# Altium PCB PL2303HXD.PcbDoc
Units mm, origin at the board's own origin, x right, y up, seen from the top; angles counter-clockwise.
Board outline 152.4 x 101.6 mm, 2 copper layers (Top Layer, Bottom Layer); 16 components, 36 nets, 107 pads, 18 vias.
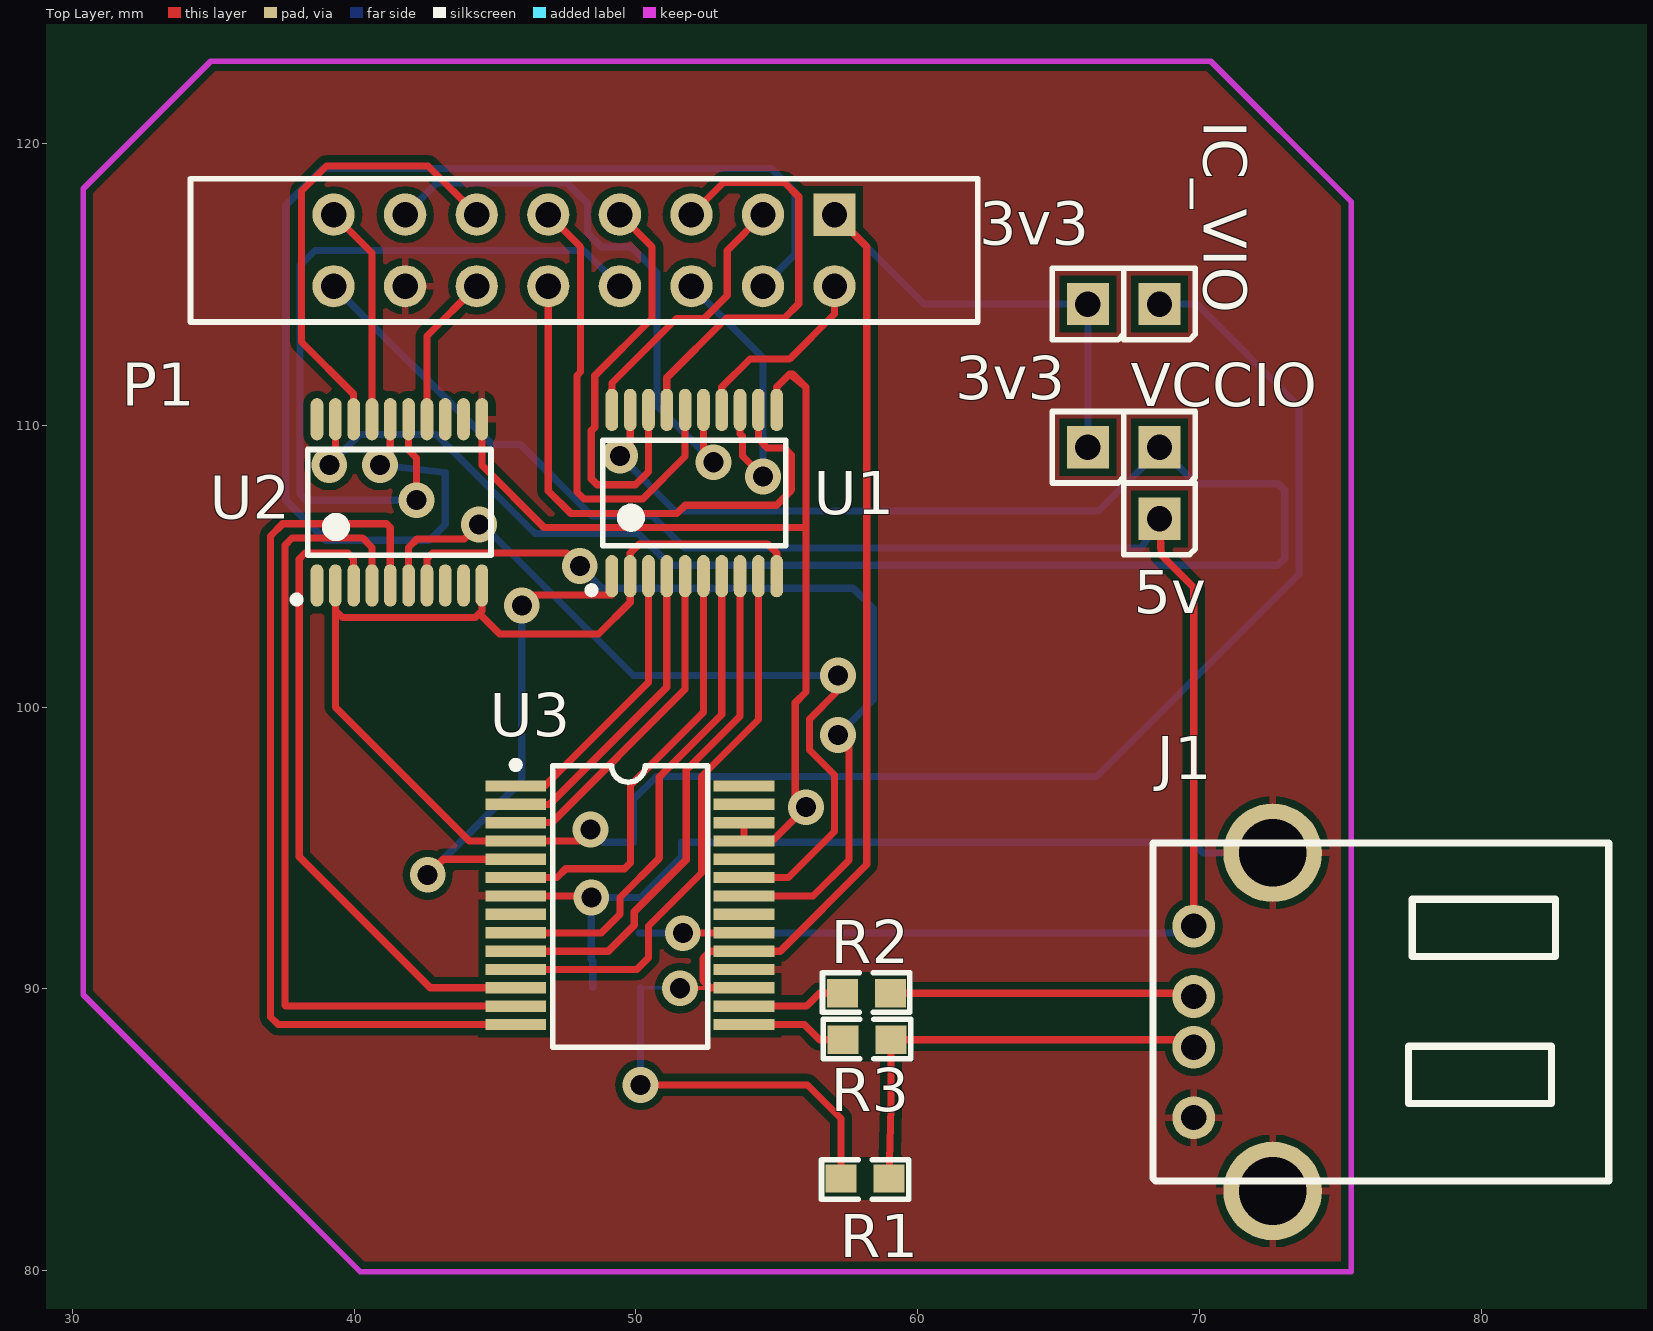
[diagram p0: Top Layer view]
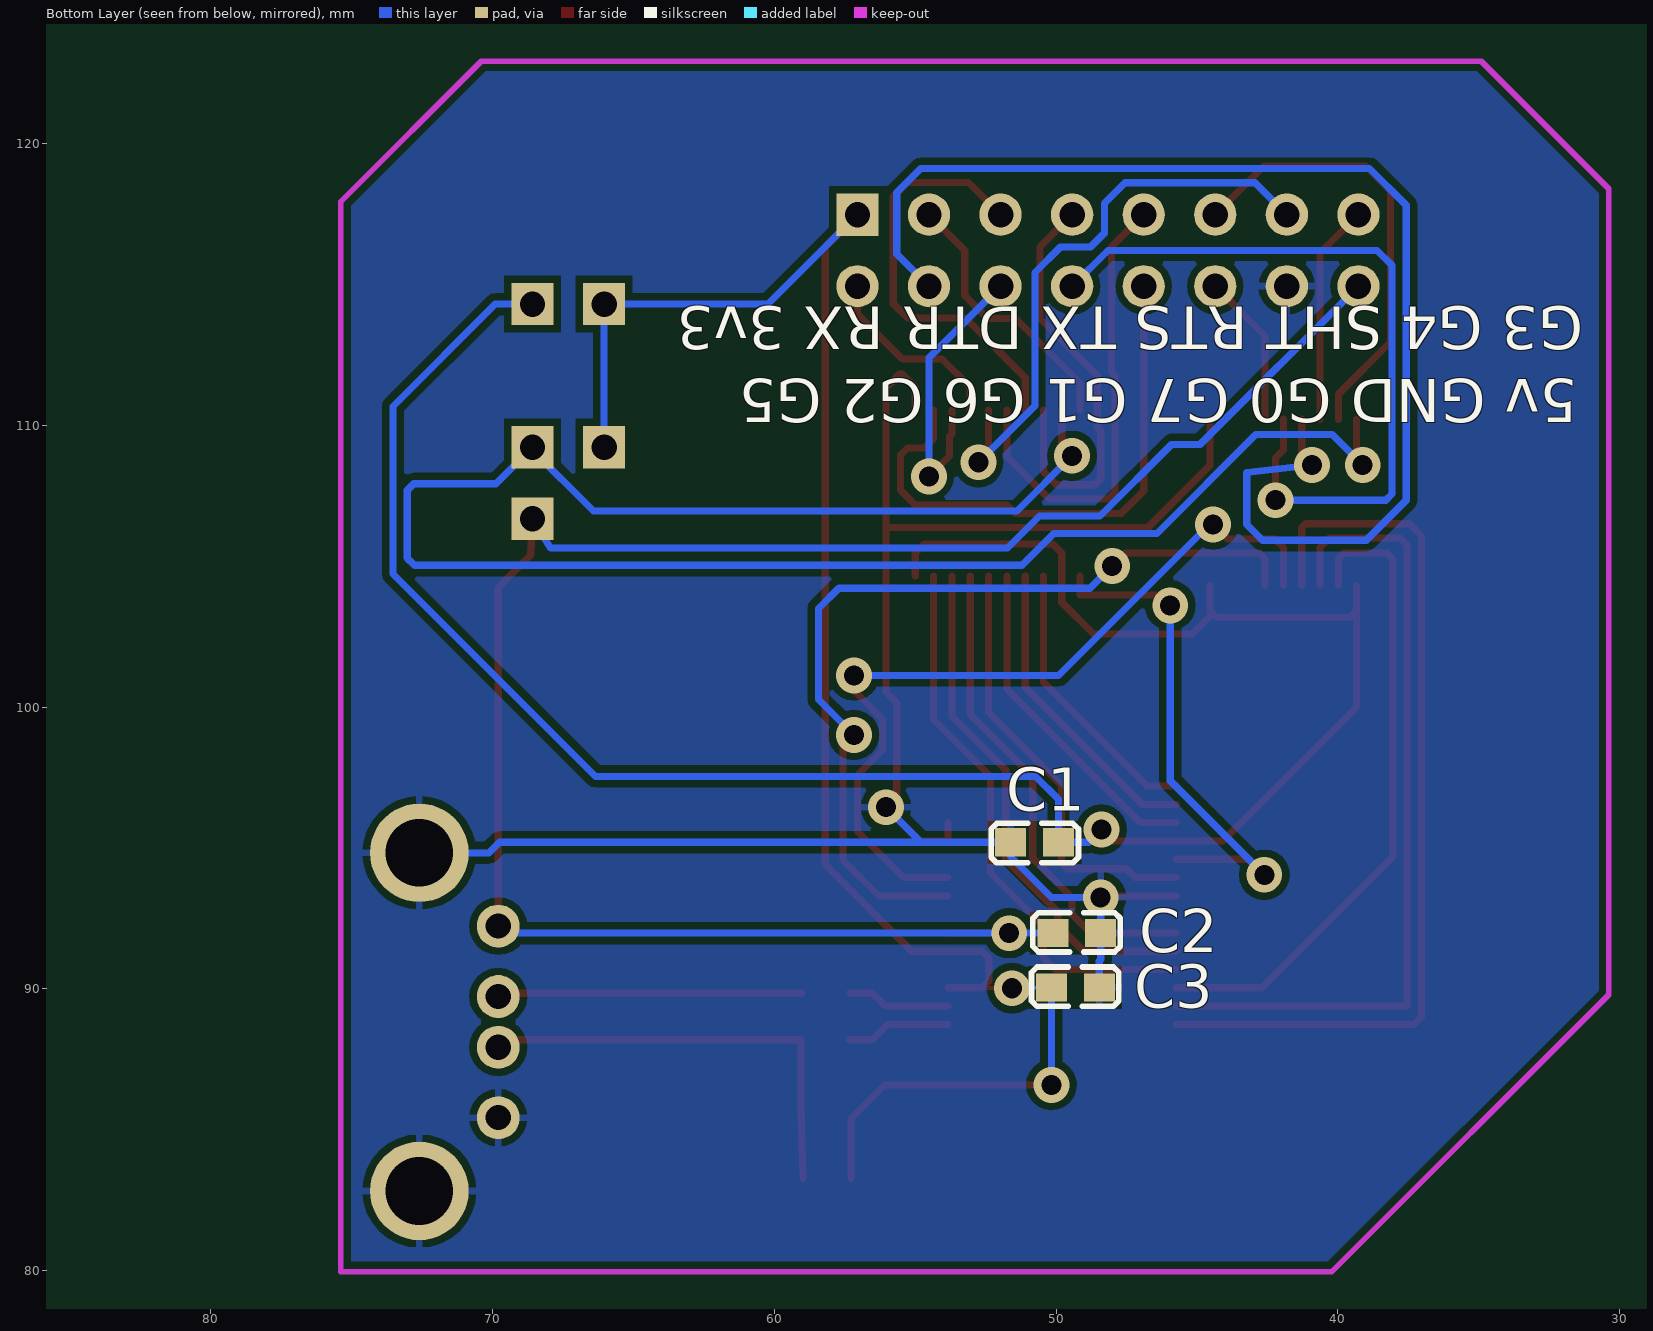
[diagram p1: Bottom Layer view, seen from below]

## Layer stack, top to bottom
Top Solder: solder mask 0.0102, Solder Resist, Dk 3.5
Top Layer: signal copper 0.0356
Dielectric 1: dielectric 0.32, FR-4, Dk 4.8
Bottom Layer: signal copper 0.0356
Bottom Solder: solder mask 0.0102, Solder Resist, Dk 3.5

## Board outline
25.4,25.4 177.8,25.4 177.8,127 25.4,127

## Design rules (kind name [scope] priority, off if disabled: settings)
Clearance [All] p1: gap=0.254
ComponentClearance [All] p1 off: gap=0.254 collisioncheckmode=3 verticalgap=0.254 showdistances=FALSE
HoleSize [All] p1 off: absolutevalues=TRUE maxlimit=2.54 minlimit=0.025 maxpercent=80.000 minpercent=20.000
HoleToHoleClearance [All] p1 off: gap=0.254 allowstackedmicrovias=TRUE
LayerPairs [All] p1 off: enforce=TRUE
MinimumSolderMaskSliver [All] p1 off: minsoldermaskwidth=0.254
NetAntennae [All] p1 off: netantennaetolerance=0
PasteMaskExpansion [All] p1 off: expansion=0
PolygonConnect [All] p1: connectstyle=Relief reliefconductorwidth=0.254 reliefentries=4 polygonreliefangle="90 Angle" airgapwidth=0.254
RoutingVias [All] p1: holewidth=0.711 width=1.27 viastyle="Through Hole" minholewidth=0.711 minwidth=1.27 maxholewidth=0.711 maxwidth=1.27
SilkToBoardRegionClearance [All] p1 off:
SilkToSilkClearance [All] p1 off: silktosilkclearance=0.254
SilkToSolderMaskClearance [IsPad] p1 off: minsilkscreentomaskgap=0.254 clearancetoexposedcopper=TRUE
SolderMaskExpansion [All] p1 off: expansion=0.102
Width [All] p1: maxlimit=2.54 minlimit=0.152 preferedwidth=0.254
20 further rules are at their usual default settings.

## Classes and differential pairs
component class pl2303HXD: 3v3 5v C1 C2 C3 IC_VIO J1 P1 R1 R2 R3 U1 U2 U3 VCCIO

## Components (designator, comment, footprint, x,y, rotation, side; value= is the part's Value field where it differs from the comment)
3v3 "Header 1" HDR1*1 66.04,109.22 r0 top (schematic designator H3)
3v3 "Header 1" HDR1*1 66.04,114.3 r0 top (schematic designator H4)
5v "Header 1" HDR1*1 68.58,106.68 r0 top (schematic designator H2)
C1 "Cap" CAP-0603 49.911,95.199 r0 bottom
C2 "Cap" CAP-0603 50.114,91.973 r180 bottom
C3 "Cap" CAP-0603 50.165,90.043 r180 bottom
IC_VIO "Header 1" HDR1*1 68.58,114.3 r0 top (schematic designator H5)
J1 "USB_CON" USB-A 71.196,88.824 r0 top
P1 "Header 8X2" HDR2*8 57.048,117.475 r180 top
R1 "Res2" RES-0603 58.979,83.261 r180 top
R2 "Res2" RES-0603 57.328,89.84 r0 top
R3 "Res2" RES-0603 57.353,88.189 r0 top
U1 "TXS0108" TSSOP20_44MM_065P 52.07,107.594 r90 top
U2 "TXS0108" TSSOP20_44MM_065P 41.605,107.264 r90 top
U3 "PL2303HXD" SSOP28 49.784,92.964 r270 top
VCCIO "Header 1" HDR1*1 68.58,109.22 r0 top (schematic designator H1)

## Footprints (in the part's own frame and the unit in brackets; to place one, negate y for a bottom-side part, rotate by r counter-clockwise, add the part's x,y. Pads: shape width x height; smd on the part's side, far side on the other; paste and mask are expansions set on the pad)
CAP-0603 [mm]
  rect 1.1x1 smd: 1(0,0) 2(1.7,0)
  silkscreen extent -0.71,-0.67 2.39,0.73
HDR1*1 [mm]
  rect 1.5x1.5 hole 0.9: 1(0,0)
  silkscreen extent -1.27,-1.27 1.27,1.27
HDR2*8 [mm]
  rect 1.5x1.5 hole 0.9: 1(0,0)
  round 1.5 hole 0.9: 2(2.54,0) 3(5.08,0) 4(7.62,0) 5(10.16,0) 6(12.7,0) 7(15.24,0) 8(17.78,0) 9(0,2.54) 10(2.54,2.54) 11(5.08,2.54) 12(7.62,2.54) 13(10.16,2.54) 14(12.7,2.54) 15(15.24,2.54) 16(17.78,2.54)
  silkscreen extent -5.08,-1.27 22.86,3.81
RES-0603 [mm] "1/10W"
  rect 1.1x1 smd: 1(0,0) 2(1.7,0)
  silkscreen extent -0.71,-0.67 2.39,0.73
SSOP28 [mm]
  rect 0.4x2.15 smd: 1(-4.231,-4.051) 2(-3.581,-4.051) 3(-2.931,-4.051) 4(-2.281,-4.051) 5(-1.631,-4.051) 6(-0.981,-4.051) 7(-0.331,-4.051) 8(0.319,-4.051) 9(0.981,-4.051) 10(1.631,-4.051) 11(2.281,-4.051) 12(2.931,-4.051) 13(3.581,-4.051) 14(4.231,-4.051) 15(4.231,4.051) 16(3.581,4.051) 17(2.931,4.051) 18(2.281,4.051) 19(1.631,4.051) 20(0.981,4.051) 21(0.319,4.051) 22(-0.331,4.051) 23(-0.981,4.051) 24(-1.631,4.051) 25(-2.281,4.051) 26(-2.931,4.051) 27(-3.581,4.051) 28(-4.231,4.051)
  silkscreen extent -5.11,-4.18 5.05,2.77
TSSOP20_44MM_065P [mm]
  oval 1.5x0.45 smd: 1(-2.95,2.925) 2(-2.95,2.275) 3(-2.95,1.625) 4(-2.95,0.975) 5(-2.95,0.325) 6(-2.95,-0.325) 7(-2.95,-0.975) 8(-2.95,-1.625) 9(-2.95,-2.275) 10(-2.95,-2.925) 11(2.95,-2.925) 12(2.95,-2.275) 13(2.95,-1.625) 14(2.95,-0.975) 15(2.95,-0.325) 16(2.95,0.325) 17(2.95,0.975) 18(2.95,1.625) 19(2.95,2.275) 20(2.95,2.925)
  silkscreen extent -3.57,-3.25 1.87,3.77
USB-A [mm]
  round 1.524 hole 0.889: 1(-1.4,3.4) 2(-1.4,0.9) 3(-1.4,-0.9) 4(-1.4,-3.4)
  round 3.5 hole 2.4: 4(1.4,-6) 4(1.4,6)
  silkscreen extent -2.85,-5.65 13.33,6.35

## Part data
C1 C2 C3: "Capacitor"
J1: library part USBx4, "USB 1.1, Right Angle, Thru-Hole, A Type, Receptacle, 4x4x4x4 Position, Fourfold Stacked, Black"
P1: "Header, 8-Pin, Dual row"
R1 R2 R3: "Resistor"

## Via types
v1: diameter 1.27, hole 0.711, Top Layer to Bottom Layer, 18 vias

## Nets (pads, with @x,y where several pads share a name; then routed paths per layer and width w, separated by ;. In a path a pad name is that pad's centre, name@x,y a point inside that pad or via, vN(x,y) a via of type N, cw(c..) or ccw(c..) an arc to the next point about the centre after c; other vN are vias at no path point)
CTS_N(G7): U1.9 U3.11 | length 20
  Top Layer w0.254: U3.11 50.026,90.683 50.446,91.103 50.446,92.229 52.324,94.107 52.324,97.536 54.345,99.557 U1.9
DCD_N(G6): U1.8 U3.10 | length 18.5
  Top Layer w0.254: U3.10 49.019,91.333 49.938,92.253 49.938,92.732 51.786,94.58 51.786,97.76 53.695,99.67 U1.8
DGND: C1.2 C2.2 C3.2 J1.4 P1.15 U1.11 U2.11 U3.7 U3.18 U3.25 U3.26 | length 68.9
  Top Layer w0.254: U2.11 44.53,108.581 46.746,106.365 56.032,106.365 ; U3.7 48.363,93.295 v1(48.414,93.243) ; U3.26 U3.25 54.833,95.245 v1@55.651,96.063 ; U1.11 54.995,111.354 55.452,111.811 ; v1(56.032,96.444) v1@55.651,96.063 ; 55.452,111.811 55.575,111.811 56.032,111.354 ; 55.452,111.811 56.032,111.354 ; v1@55.651,96.063 55.651,100.152 56.032,100.533 56.032,106.365 ; 56.032,106.365 56.032,111.354
  Bottom Layer w0.254: C3.2 48.465,90.983 48.414,91.034 C2.2 v1(48.414,93.243) 50.163,93.243 51.611,94.691 C1.2 54.788,95.199 ; v1(56.032,96.444) 54.788,95.199 ; J1.4@72.596,94.824 70.129,94.824 69.754,95.199 54.788,95.199
DM: J1.2 R2.2 | length 10.7
  Top Layer w0.254: R2.2 J1.2@69.68,89.84
DP: J1.3 R1.1 R3.2 | length 15.4
  Top Layer w0.254: R1.1 59.053,85.799 R3.2 J1.3@69.531,88.189
DSR_N(G5): U1.7 U3.9 | length 17.5
  Top Layer w0.254: U3.9 48.768,91.983 49.43,92.645 49.43,93.24 50.825,94.635 50.825,97.518 53.045,99.738 U1.7
DTR_N: U1.4 U3.2 | length 11
  Top Layer w0.254: U3.2 46.939,96.545 51.095,100.701 U1.4
DTR_NO: P1.3 U1.17 | length 15.2
  Top Layer w0.254: U1.17 51.095,111.684 53.215,113.804 55.27,113.804 55.778,114.312 55.778,118.11 55.27,118.618 53.111,118.618 P1.3
G0: P1.14 U2.14 | length 5.5
  Top Layer w0.254: U2.14 42.58,113.167 P1.14
G1: P1.12 U2.15 | length 27.4
  Top Layer w0.254: U2.15 41.93,109.118 42.215,108.834 v1(42.215,107.34)
  Bottom Layer w0.254: v1(42.215,107.34) 38.299,107.34 38.08,107.559 38.08,115.677 38.608,116.205 48.158,116.205 P1.12
G2: P1.10 U2.16 | length 45.7
  Top Layer w0.254: v1(40.919,108.585) 41.28,108.946 U2.16
  Bottom Layer w0.254: v1(40.919,108.585) 43.231,108.329 43.231,106.477 42.672,105.918 38.989,105.918 37.572,107.335 37.572,117.811 38.875,119.114 54.8,119.114 55.651,118.262 55.651,116.078 P1.10
G3: P1.8 U2.17 | length 7.8
  Top Layer w0.254: P1.8 40.63,116.113 U2.17
G4: P1.7 U1.15 | length 20.9
  Top Layer w0.254: U1.15 52.395,109.047 v1(52.756,108.687)
  Bottom Layer w0.254: P1.7 42.939,118.606 47.549,118.606 48.285,117.869 48.285,116.815 48.768,116.332 49.835,116.332 50.749,115.418 50.749,110.693 v1(52.756,108.687)
G5: P1.9 U1.14 | length 6.9
  Top Layer w0.254: U1.14 53.045,111.354 54.048,112.356 55.455,112.356 57.048,113.95 P1.9
G6: P1.11 U1.13 | length 10.5
  Top Layer w0.254: U1.13 53.695,109.694 53.777,109.612 53.777,108.909 v1(54.508,108.179)
  Bottom Layer w0.254: P1.11 54.508,112.396 v1(54.508,108.179)
G7: P1.13 U1.12 | length 20.3
  Top Layer w0.254: P1.13 46.888,107.671 47.686,106.873 51.461,106.873 51.75,107.163 54.99,107.163 55.524,107.696 55.524,108.941 55.27,109.195 54.661,109.195 54.345,109.51 U1.12
GND: 
GP0: U2.7 U3.22 | length 31.5
  Top Layer w0.254: U2.7 42.58,105.258 42.783,105.461 47.549,105.461 v1(48.006,105.004) ; U3.22 56.287,93.295 57.556,94.564 57.556,98.628 v1(57.175,99.009)
  Bottom Layer w0.254: v1(48.006,105.004) 48.793,104.216 57.709,104.216 58.43,103.495 58.43,100.264 v1(57.175,99.009)
GP1: U2.6 U3.23 | length 29.4
  Top Layer w0.254: U2.6 41.93,105.664 42.235,105.969 43.917,105.969 v1(44.425,106.477) ; U3.23 55.413,93.945 57.048,95.58 57.048,97.587 56.159,98.476 56.159,99.568 57.175,100.584 v1(57.175,101.117)
  Bottom Layer w0.254: v1(44.425,106.477) 44.552,106.477 49.911,101.117 v1(57.175,101.117)
GP2: U2.5 U3.14 | length 32.4
  Top Layer w0.254: U2.5 41.28,106.37 41.148,106.502 37.465,106.502 37.033,106.07 37.033,89.002 37.302,88.733 U3.14
GP3: U2.4 U3.13 | length 29.2
  Top Layer w0.254: U2.4 40.63,105.664 40.3,105.994 37.795,105.994 37.541,105.74 37.541,89.408 37.566,89.383 U3.13
IC_VIO: C1.1 IC_VIO.1 U1.2 U1.10 U2.2 U2.10 U3.4 | length 78.5
  Top Layer w0.254: U2.2 39.33,103.429 ; U2.10 44.53,103.407 44.439,103.317 ; v1(48.387,95.651) 47.981,95.245 U3.4 44.081,95.245 39.33,99.996 39.33,103.429 ; U1.10 54.995,105.461 54.665,105.791 50.125,105.791 49.795,105.461 U1.2 49.795,103.719 48.666,102.591 45.165,102.591 44.439,103.317 ; 39.33,103.429 39.584,103.175 44.298,103.175 44.439,103.317
  Bottom Layer w0.254: v1(48.387,95.651) 48.839,95.199 C1.1 49.911,96.723 50.724,97.536 66.345,97.536 73.533,104.724 73.533,110.668 69.901,114.3 IC_VIO.1
NetR2_1: R2.1 U3.16 | length 3.7
  Top Layer w0.254: U3.16 56.058,89.383 56.515,89.84 R2.1
NetR3_1: R3.1 U3.15 | length 3.7
  Top Layer w0.254: U3.15 55.971,88.733 56.515,88.189 R3.1
RI_N(G4): U1.6 U3.6 | length 15.5
  Top Layer w0.254: U3.6 47.193,93.945 47.508,94.259 49.596,94.259 49.809,94.473 49.809,97.226 52.395,99.812 U1.6
RTS_N: U1.5 U3.3 | length 12
  Top Layer w0.254: U3.3 47.008,95.895 51.745,100.632 U1.5
RTS_NO: P1.5 U1.16 | length 16.6
  Top Layer w0.254: P1.5 48.031,116.332 48.031,111.886 47.904,111.76 47.904,107.635 48.158,107.381 50.239,107.381 51.745,108.887 U1.16
RX: P1.2 U1.20 | length 9.7
  Top Layer w0.254: U1.20 49.145,111.502 51.435,113.792 52.426,113.792 53.238,114.605 53.238,116.205 P1.2
RXD: U1.1 U3.5 | length 18.3
  Top Layer w0.254: v1(42.608,94.043) 43.16,94.595 U3.5 ; v1(45.949,103.607) 46.319,103.977 49.145,103.977 U1.1
  Bottom Layer w0.254: v1(42.608,94.043) 45.949,97.384 v1(45.949,103.607)
SHTD_N: U2.3 U3.12 | length 23.2
  Top Layer w0.254: U2.3 39.98,105.258 39.777,105.461 38.252,105.461 38.049,105.258 38.049,94.681 42.697,90.033 U3.12
SHTD_NO: P1.6 U2.18 | length 16.2
  Top Layer w0.254: U2.18 39.98,111.1 38.125,112.954 38.125,118.313 39.014,119.202 42.621,119.202 P1.6
TX: P1.4 U1.18 | length 15.2
  Top Layer w0.254: P1.4 50.571,116.332 50.571,113.792 48.539,111.76 48.539,109.931 48.412,109.805 48.412,108.102 48.625,107.889 49.987,107.889 50.445,108.347 U1.18
TXD: U1.3 U3.1 | length 10
  Top Layer w0.254: U3.1 46.761,97.195 50.445,100.878 U1.3
VCC_IO: U1.19 U2.19 VCCIO.1 | length 68.3
  Top Layer w0.254: v1(39.116,108.585) 39.33,108.799 U2.19 ; v1(49.428,108.915) 49.795,109.282 U1.19
  Bottom Layer w0.254: v1(39.116,108.585) 40.208,109.677 42.899,109.677 46.419,106.157 50.079,106.157 51.207,105.029 72.771,105.029 73.025,105.283 73.025,107.696 72.796,107.925 69.875,107.925 VCCIO.1 ; v1(49.428,108.915) 51.384,106.959 66.421,106.959 VCCIO.1@68.631,109.169
VDD5: 5v.1 C2.1 J1.1 P1.16 U3.20 | length 71.4
  Top Layer w0.254: v1(51.664,91.973) 51.673,91.983 U3.20 ; 5v.1@68.986,106.274 5v.1 68.644,105.397 69.796,104.245 J1.1
  Bottom Layer w0.254: P1.16 44.881,109.322 45.892,109.322 48.44,106.774 50.587,106.774 51.723,105.639 67.945,105.639 5v.1 ; C2.1 v1(51.664,91.973) 69.796,91.973 J1.1
VO_33: 3v3.1 C3.1 P1.1 R1.2 U3.17 U3.19 | length 65.3
  Top Layer w0.152: v1(51.562,90.018) U3.17
  Top Layer w0.254: v1(50.165,86.589) 56.083,86.589 57.279,85.393 R1.2 ; U3.17 52.629,90.033 52.375,90.287 52.375,91.079 52.629,91.333 U3.19 55.118,91.333 58.191,94.407 58.191,116.332 P1.1
  Bottom Layer w0.152: C3.1 v1(51.562,90.018)
  Bottom Layer w0.254: v1(50.165,86.589) C3.1 ; P1.1 60.223,114.3 66.04,114.3 3v3.1@66.04,109.22
pads on no net: U2.1 U2.8 U2.9 U2.12 U2.13 U2.20 U3.8 U3.21 U3.24 U3.27 U3.28

## Polygon pours and split planes (outlines as drawn)
DGND on Bottom Layer "DGND" (solid, remove dead copper, pour order 11): 88.621,68.504 88.621,111.506 97.993,120.879 86.208,132.664 13.538,132.664 13.538,98.171 6.071,90.703 12.649,84.125 12.649,68.682
DGND on Top Layer "DGND" (solid, remove dead copper, pour order 15): 112.37,69.367 112.37,114.808 83.058,144.12 69.875,130.937 0,130.937 0,108.915 0,80.467

## Keep-outs
Keep-Out Layer:
  lines w0.2: 30.381,89.786 40.208,79.959 75.381,79.959 75.381,117.938 70.398,122.921 34.91,122.921 30.381,118.392 30.381,89.786

## Silkscreen, mask and mechanical layers (free items; w line width, h text height)
Bottom Overlay:
  text "G3 G4 SHT RTS TX DTR RX 3v3" at 31.293,114.198 h1.5 r180
  text "5v GND G0 G7 G1 G6 G2 G5" at 31.496,111.633 h1.52 r180